# EAGLE board Projeto 2 Automação (EAGLE 9.7.0)

Size 106.33 x 77.86 mm. Coordinates in mm from the lower left corner, seen from the top.
Outline: 0,0 106.33,0 106.33,77.86 0,77.86 0,0
Copper layers (1*16): Top 0.035mm / dielectric 1.5mm / Bottom 0.035mm
Design rules "default": minimum track width 6mil, minimum drill 0.35mm, track to track 6mil, track to pad 6mil, pad to pad 6mil, via to via 6mil, smd to smd 6mil, copper to edge 40mil, drill to drill 6mil, minimum pad ring 10mil, minimum via ring 8mil, stop-mask expansion 4mil, vias tented up to drill 0mil, thermal gap 10mil

## Footprints (pad centres in the part's own frame; a part is rotated, then mirrored left to right if it is on the bottom)
LEDRD254W60D565H860B = drill 0.981 pad 1.581: 1 -1.27,0; 2 1.27,0
RESAD1016W63L850D250B = drill 0.83 pad 1.43: 1 -5.08,0; 2 5.08,0
SWITCH-MOMENTARY-PTH-6.5MM = drill 1.016 pad 1.88: 1 -3.251,2.261; 2 3.251,2.261; 3 -3.251,-2.261; 4 3.251,-2.261
ARDUINO-UNO-R3-SHIELD = drill 1.016 pad 1.88: 3.3V 24.13,-2.54; 5V 24.13,0; A0 24.13,12.7; A1 24.13,15.24; A2 24.13,17.78; A3 24.13,20.32; A4 24.13,22.86; A5 24.13,25.4; AREF -24.13,-13.97; D2 -24.13,20.32; D3 -24.13,17.78; D4 -24.13,15.24; D5 -24.13,12.7; D6 -24.13,10.16; D7 -24.13,7.62; D8 -24.13,3.81; D9 -24.13,1.27; D10 -24.13,-1.27; D11 -24.13,-3.81; D12 -24.13,-6.35; D13 -24.13,-8.89; GND@0 24.13,2.54; GND@1 24.13,5.08; GND@2 -24.13,-11.43; IOREF 24.13,-7.62; NC 24.13,-10.16; RES 24.13,-5.08; RX -24.13,25.4; SCL -24.13,-19.05; SDA -24.13,-16.51; TX -24.13,22.86; VIN 24.13,7.62

## Placement (x,y rotation side)
D1  RED  [LEDRD254W60D565H860B]  37.9,69.57 180 top
D2  RED  [LEDRD254W60D565H860B]  88.72,69.38 180 top
D3  RED  [LEDRD254W60D565H860B]  76.45,69.66 180 top
D4  RED  [LEDRD254W60D565H860B]  82.26,69.37 180 top
D5  RED  [LEDRD254W60D565H860B]  42.79,69.72 180 top
D6  RED  [LEDRD254W60D565H860B]  48.08,69.7 180 top
D7  RED  [LEDRD254W60D565H860B]  53.75,69.91 180 top
D8  RED  [LEDRD254W60D565H860B]  59.83,69.88 180 top
D9  RED  [LEDRD254W60D565H860B]  65.36,69.88 180 top
D10  RED  [LEDRD254W60D565H860B]  70.92,69.95 180 top
D11  RED  [LEDRD254W60D565H860B]  94.78,69.17 180 top
D12  RED  [LEDRD254W60D565H860B]  100.27,68.8 180 top
R1  160  [RESAD1016W63L850D250B]  36.45,59.05 90 top
S1  SWITCH_MOMENTARY  [SWITCH-MOMENTARY-PTH-6.5MM]  85.03,56.57 0 top
U1  ARDUINO-UNO-R3-SHIELD  [ARDUINO-UNO-R3-SHIELD]  47.88,29.84 270 top

## Library data of the parts
D1-D12 = Tinkercad; CATEGORY: Opto-Electronic; SUB-CATEGORY: LED; VALUE: LED_RED
R1 S1 U1 = Tinkercad

## Nets
D1_C: D1.2 D2.2 D3.2 D4.2 D5.2 D6.2 D7.2 D8.2 D9.2 D10.2 D11.2 D12.2 R1.2
U1_D2: D11.1 U1.D2
U1_D3: D2.1 U1.D3
U1_D4: D4.1 U1.D4
U1_D6: D3.1 U1.D6
U1_D7: D10.1 U1.D7
U1_D8: D9.1 U1.D8
U1_D9: D8.1 U1.D9
U1_D10: D7.1 U1.D10
U1_D11: D6.1 U1.D11
U1_D12: D5.1 U1.D12
U1_D13: D1.1 U1.D13
U1_GND: R1.1 S1.2 U1.GND@0 U1.GND@1 U1.GND@2
U1_RX: S1.3 U1.RX
U1_TX: D12.1 U1.TX

## Tracks (layer width: path | path; a pad name or v marks a point on that pad's centre or on a via)
D1_C  (12 unrouted)
U1_D2  (1 unrouted)
U1_D3  (1 unrouted)
U1_D4  (1 unrouted)
U1_D6  (1 unrouted)
U1_D7  (1 unrouted)
U1_D8  (1 unrouted)
U1_D9  (1 unrouted)
U1_D10  (1 unrouted)
U1_D11  (1 unrouted)
U1_D12  (1 unrouted)
U1_D13  (1 unrouted)
U1_GND  (4 unrouted)
U1_RX  (1 unrouted)
U1_TX  (1 unrouted)